# Altium PCB dual_channel.PcbDoc
Units mm, origin at the board's own origin, x right, y up, seen from the top; angles counter-clockwise.
Board outline 74.68 x 95.9 mm, 2 copper layers (Top Layer, Bottom Layer); 79 components, 38 nets, 223 pads, 57 vias.
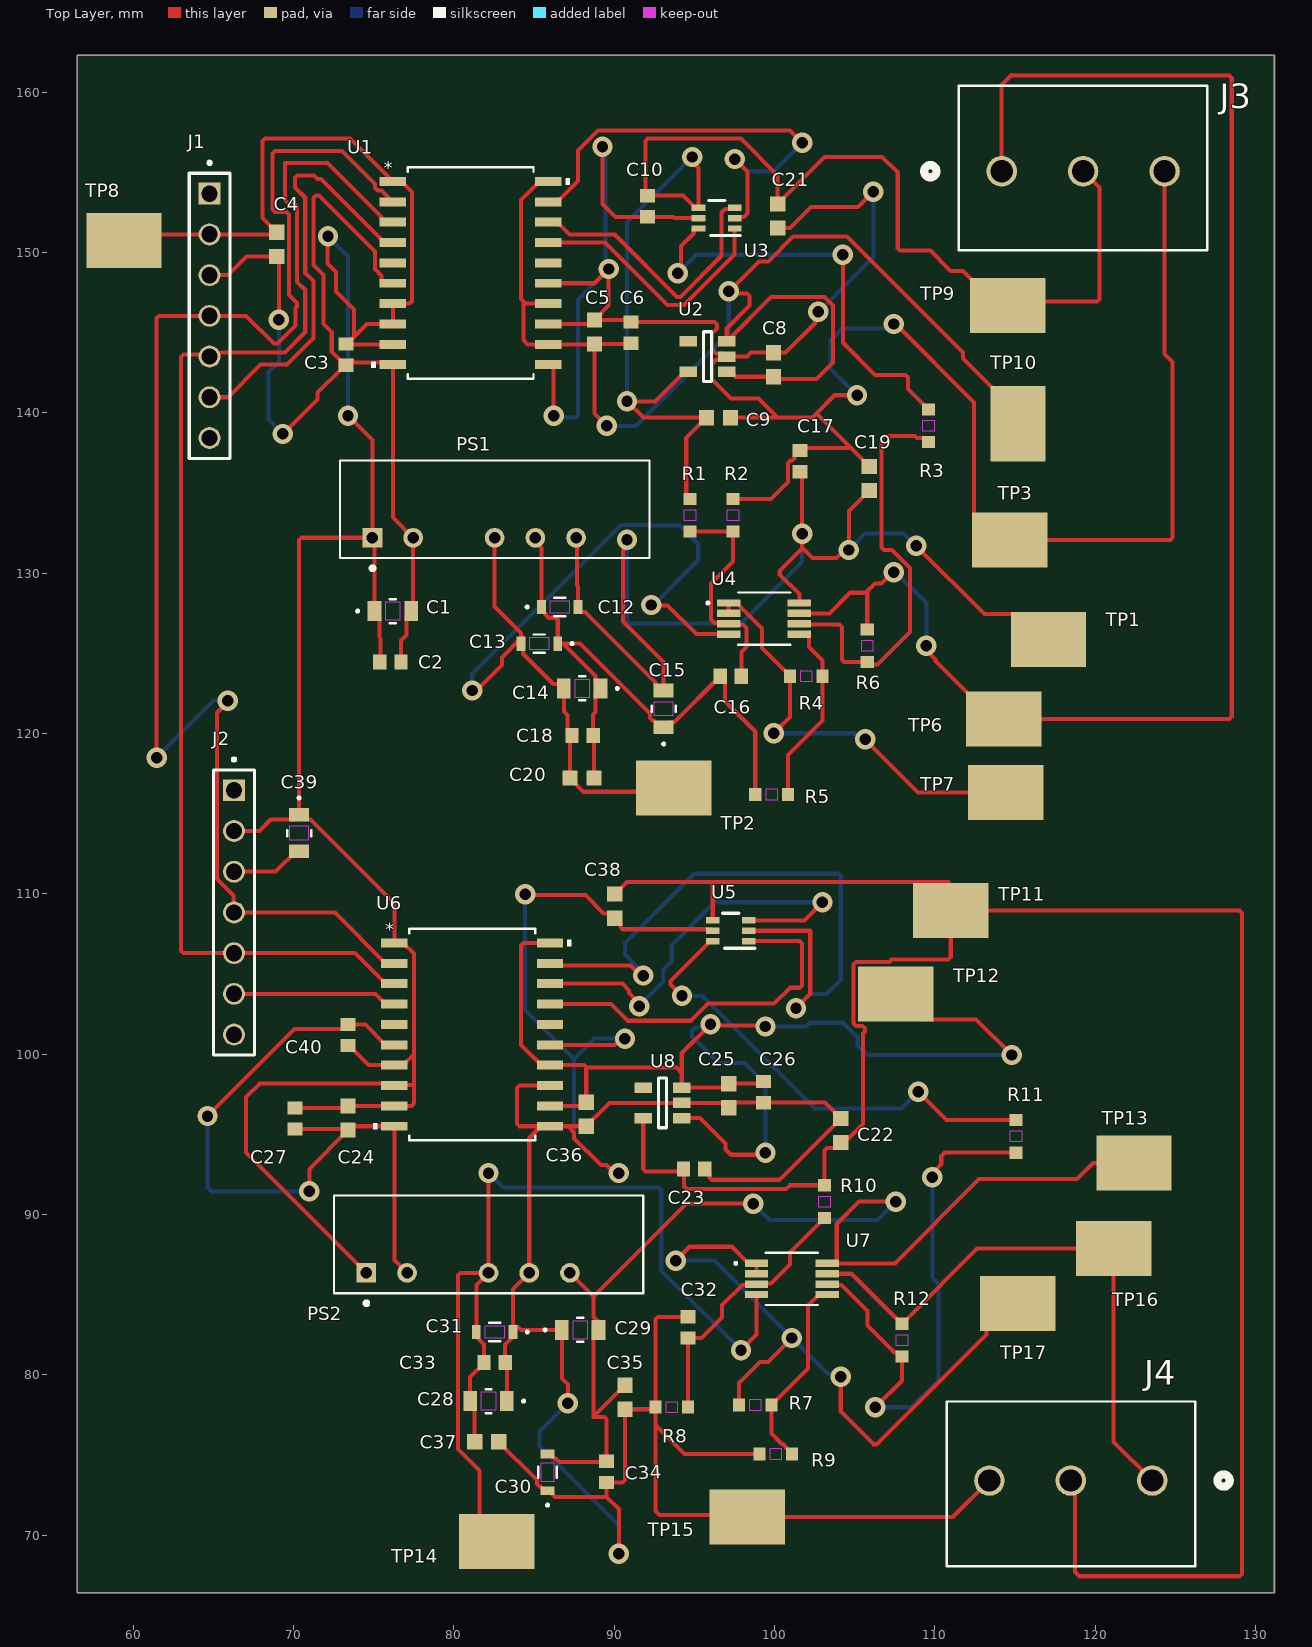
[diagram p0: Top Layer view]
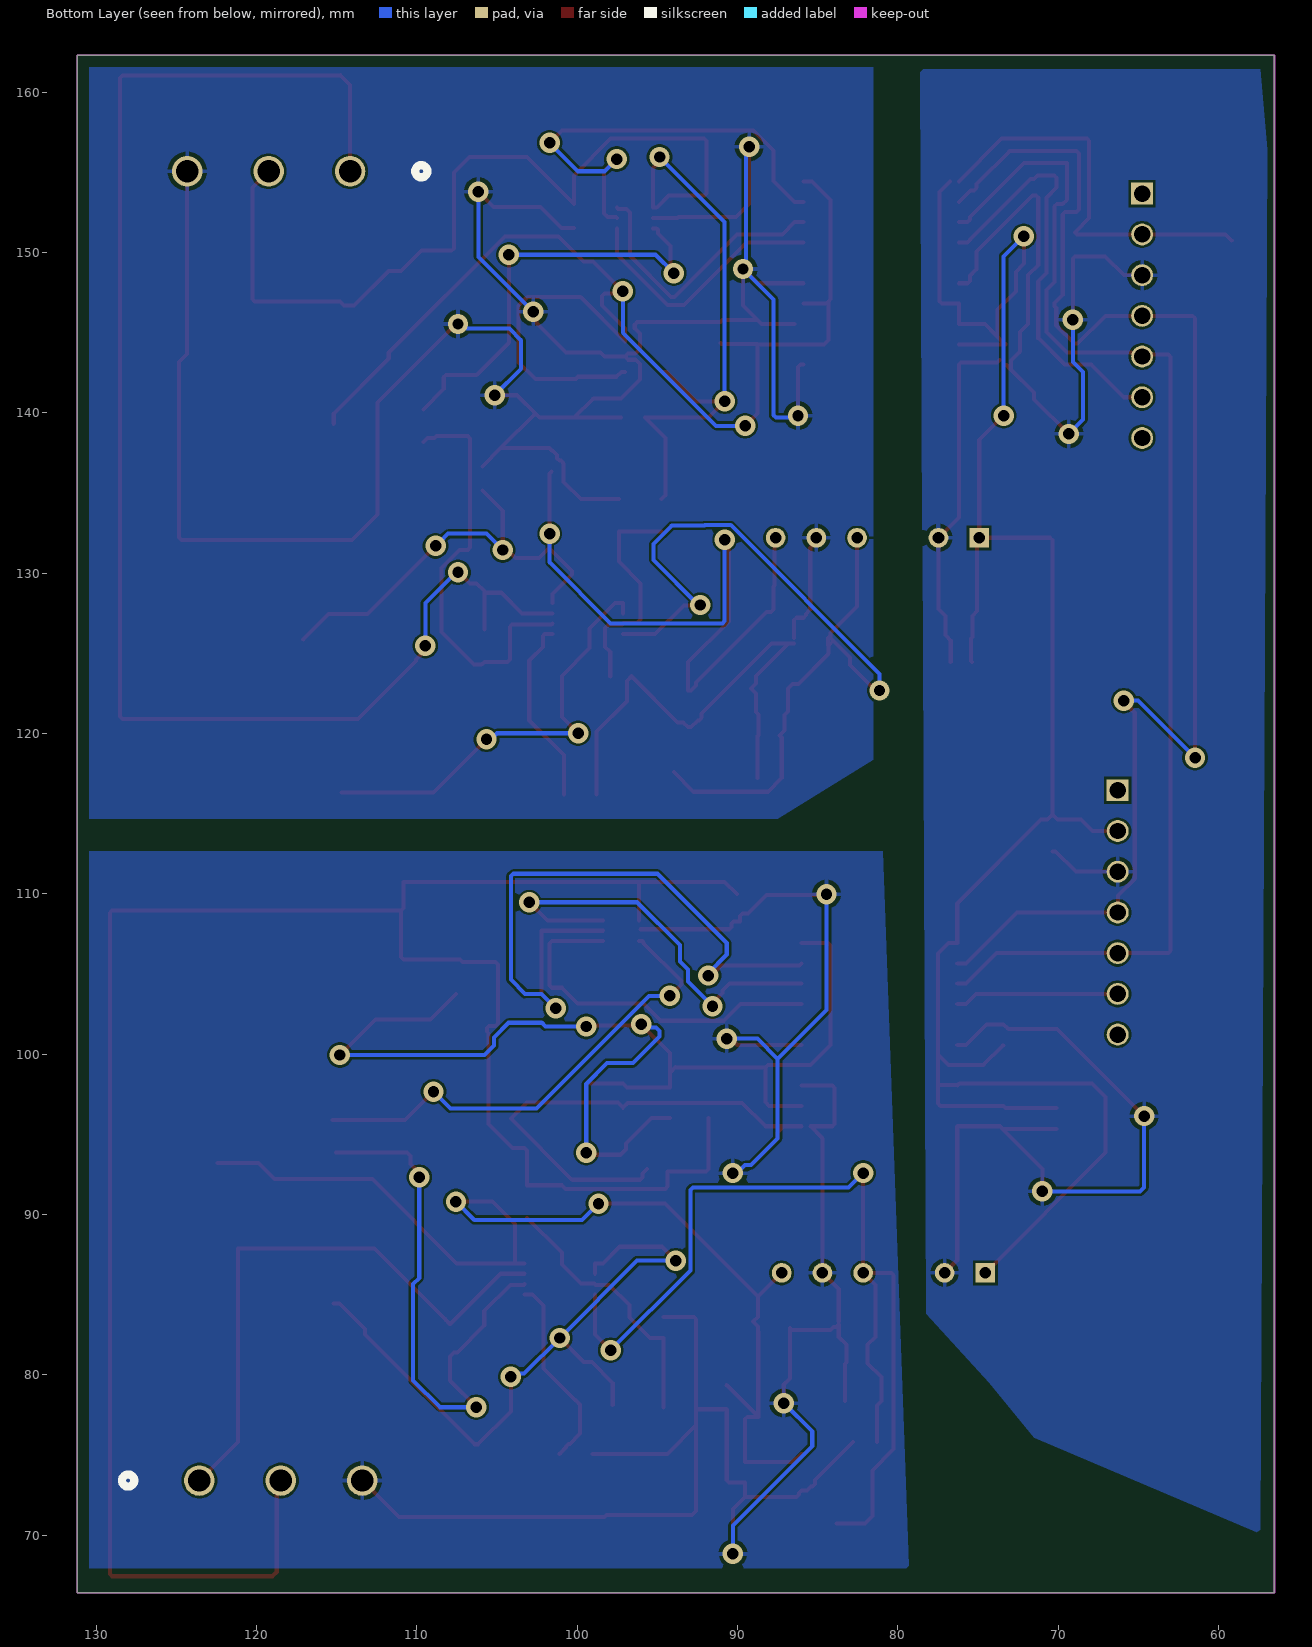
[diagram p1: Bottom Layer view, seen from below]

## Layer stack, top to bottom
Top Solder: solder mask 0.0102, Solder Resist, Dk 3.5
Top Layer: signal copper 0.0356
Dielectric 1: dielectric 0.32, FR-4, Dk 4.8
Bottom Layer: signal copper 0.0356
Bottom Solder: solder mask 0.0102, Solder Resist, Dk 3.5

## Board outline
56.515,66.404 56.515,162.306 131.191,162.306 131.191,66.404

## Design rules (kind name [scope] priority, off if disabled: settings)
Clearance [All] p1: gap=0.15 ignorepadtopadclearanceinfootprint=FALSE
MinimumSolderMaskSliver [All] p1: minsoldermaskwidth=0.1
PolygonConnect [All] p1: connectstyle=Relief reliefconductorwidth=0.254 reliefentries=4 polygonreliefangle="90 Angle" airgapwidth=0.254
RoutingVias [All] p1: holewidth=0.711 width=1.27 viastyle="Through Hole" minholewidth=0.711 minwidth=1.27 maxholewidth=0.711 maxwidth=1.27
SilkToSilkClearance [All] p1: silktosilkclearance=0.1
SolderMaskExpansion [All] p1: expansion=0.102 istentingtop=FALSE
Width [All] p1: maxlimit=0.254 minlimit=0.254 preferedwidth=0.254
28 further rules are at their usual default settings.

## Components (designator, comment, footprint, x,y, rotation, side; value= is the part's Value field where it differs from the comment)
C1 "10uF" G-21_MUR 76.2,127.635 r0 top
C2 "100nF" CAPC1608X90N 76.048,124.46 r0 top
C3 "100nF SYS" CAPC1608X90N 73.279,143.637 r90 top
C4 "1uF" INDC1608X90N 68.961,150.507 r90 top
C5 "1uF" INDC1608X90N 88.773,145.046 r90 top
C6 "100nF ISO" CAPC1608X90N 91.059,145.009 r270 top
C8 "1uF" INDC1608X90N 99.949,143.002 r270 top
C9 "1uF" INDC1608X90N 96.52,139.7 r180 top
C10 "100nF" CAPC1608X90N 92.075,152.883 r90 top
C12 "470nF" CAP_1608_TDK 86.614,127.889 r0 top
C13 "470nF" CAP_1608_TDK 85.344,125.603 r180 top
C14 "10uF" G-21_MUR 88.011,122.809 r180 top
C15 "10uF" G-21_MUR 93.091,121.539 r90 top
C16 "100nF" CAPC1608X90N 97.282,123.571 r180 top
C17 "100nF" CAPC1608X90N 101.6,136.986 r90 top
C18 "100nF" CAPC1608X90N 88.036,119.888 r180 top
C19 "1uF" INDC1608X90N 105.918,135.902 r90 top
C20 "1uF" INDC1608X90N 87.999,117.221 r180 top
C21 "1uF" INDC1608X90N 100.203,152.273 r90 top
C22 "1uF" INDC1608X90N 104.14,95.238 r270 top
C23 "100nF" CAPC1608X90N 94.996,92.837 r180 top
C24 "1uF" INDC1608X90N 73.406,96.012 r90 top
C25 "1uF" INDC1608X90N 97.155,97.409 r270 top
C26 "100nF ISO_2" CAPC1608X90N 99.314,97.638 r90 top
C27 "100nF SYS" CAPC1608X90N 70.104,95.987 r90 top
C28 "10uF" G-21_MUR 82.169,78.359 r180 top
C29 "10uF" G-21_MUR 87.884,82.804 r0 top
C30 "470nF" CAP_1608_TDK 85.852,73.914 r90 top
C31 "470nF" CAP_1608_TDK 82.55,82.677 r180 top
C32 "100nF" CAPC1608X90N 94.615,82.956 r90 top
C33 "100nF" CAPC1608X90N 82.55,80.772 r180 top
C34 "100nF" CAPC1608X90N 89.535,73.939 r270 top
C35 "1uF" INDC1608X90N 90.678,78.601 r270 top
C36 "1uF" INDC1608X90N 88.265,96.254 r90 top
C37 "1uF" INDC1608X90N 82.054,75.819 r180 top
C38 "1uF" INDC1608X90N 90.043,109.232 r90 top
C39 "10uF" G-21_MUR 70.358,113.792 r270 top
C40 "100nF" CAPC1608X90N 73.406,101.194 r90 top
J1 "SS-107-T-1A" SAMTEC_SS-107-T-1A 64.77,153.67 r90 top
J2 "SS-107-T-1A" SAMTEC_SS-107-T-1A 66.294,116.459 r90 top
J3 "1716030000" "CONN_LM 5.080390_WED" 114.173,155.067 r0 top
J4 "1716030000" "CONN_LM 5.080390_WED" 123.571,73.406 r180 top
PS1 "IA0305S" XP_IA0305S 74.93,132.207 r0 top
PS2 "IA0305S" XP_IA0305S 74.549,86.36 r0 top
R1 "10K" RC0603N_YAG 94.742,133.604 r270 top
R2 "10K" RC0603N_YAG 97.409,133.604 r90 top
R3 "10K" RC0603N_YAG 109.601,139.192 r270 top
R4 "10K" RC0603N_YAG 101.981,123.571 r0 top
R5 "20K" RC0603N_YAG 99.822,116.205 r180 top
R6 "20K" RC0603N_YAG 105.791,125.476 r270 top
R7 "10K" RC0603N_YAG 98.806,78.105 r0 top
R8 "10K" RC0603N_YAG 93.599,77.978 r180 top
R9 "20K" RC0603N_YAG 100.076,75.057 r180 top
R10 "10K" RC0603N_YAG 103.124,90.805 r270 top
R11 "10K" RC0603N_YAG 115.062,94.869 r270 top
R12 "20K" RC0603N_YAG 107.95,82.169 r270 top
TP1 "+ISO_P5V" KEYSTONE_5016 117.094,125.857 r0 top
TP2 "-ISO_N5V" KEYSTONE_5016 93.726,116.586 r0 top
TP3 "ISO_GND_ISOW" KEYSTONE_5016 114.681,132.08 r0 top
TP6 "Bi_PolarOut" KEYSTONE_5016 114.3,120.904 r0 top
TP7 "VREF_MID_TP" KEYSTONE_5016 114.427,116.332 r0 top
TP8 "TP_SYS_3V3" KEYSTONE_5016 59.436,150.749 r0 top
TP9 "TP_ISO_3V3_CLEAN" KEYSTONE_5016 114.554,146.685 r0 top
TP10 "TP_ISO_3V3_RAW" KEYSTONE_5016 115.189,139.319 r90 top
TP11 "TP_ISO_3V3_CLEAN_2" KEYSTONE_5016 110.998,108.966 r0 top
TP12 "TP_ISO_3V3_RAW_2" KEYSTONE_5016 107.569,103.759 r0 top
TP13 "+ISO_P5V_2" KEYSTONE_5016 122.428,93.218 r0 top
TP14 "-ISO_N5V_2" KEYSTONE_5016 82.677,69.596 r0 top
TP15 "ISO_GND_ISOW_2" KEYSTONE_5016 98.298,71.12 r0 top
TP16 "Bi_PolarOut_2" KEYSTONE_5016 121.158,87.884 r0 top
TP17 "VREF_MID_TP_2" KEYSTONE_5016 115.189,84.455 r0 top
U1 "ISOW7741DFM" SOIC20_DFM_TEX 81.051,148.717 r0 top
U2 "TLV70233DBVT" DBV0005A_N 95.828,143.51 r180 top
U3 "DAC8411IDCKT" DCK0006A_N 96.393,152.146 r180 top
U4 "OPA2192IDGKR" DGK0008A_N_TEX 99.355,127.168 r0 top
U5 "DAC8411IDCKT" DCK0006A_N 97.282,107.696 r180 top
U6 "ISOW7741DFM" SOIC20_DFM_TEX 81.153,101.219 r0 top
U7 "OPA2192IDGKR" DGK0008A_N_TEX 101.092,85.979 r0 top
U8 "TLV70233DBVT" DBV0005A_N 93.021,96.962 r180 top

## Footprints (in the part's own frame and the unit in brackets; to place one, negate y for a bottom-side part, rotate by r counter-clockwise, add the part's x,y. Pads: shape width x height; smd on the part's side, far side on the other; paste and mask are expansions set on the pad)
CAP_1608_TDK [mil]
  rect 21.78x35 smd paste+0 mask+0: 1(-45,0) 2(45,0)
  Top Layer keep-out region: -23.5,-15.5 -23.5,15.5 23.5,15.5 23.5,-15.5
  silkscreen extent -83,-22 13,22, body extent -34,-17 34,17, height 35
CAPC1608X90N [mm]
  rect 0.83x0.94 smd: 1(-0.66,0) 2(0.66,0)
"CONN_LM 5.080390_WED" [mil]
  round 75 hole 55 paste-99999 mask+0: 1(0,0) 2(200,0) 3(400,0)
  silkscreen extent -190,-194 505,210
DBV0005A_N [mm]
  rect 1.1x0.65 smd paste-0.102 mask+0.051: 1(-1.2,0.95) 2(-1.2,0) 3(-1.2,-0.95) 4(1.2,-0.95) 5(1.2,0.95)
  silkscreen extent -0.25,-1.55 0.25,1.55
DCK0006A_N [mm]
  rect 0.85x0.4 smd paste+0 mask+0.051: 1(-1.125,0.65) 2(-1.125,0) 3(-1.125,-0.65) 4(1.125,-0.65) 5(1.125,0) 6(1.125,0.65)
  silkscreen extent -1.5,-1.09 0.51,1.09
DGK0008A_N_TEX [mm]
  rect 1.448x0.457 smd paste+0 mask+0.051: 1(-2.2,0.975) 2(-2.2,0.325) 3(-2.2,-0.325) 4(-2.2,-0.975) 5(2.2,-0.975) 6(2.2,-0.325) 7(2.2,0.325) 8(2.2,0.975)
  silkscreen extent -3.58,-1.63 1.63,1.63, body extent -2.57,-1.5 2.57,1.5, height 1.09
G-21_MUR [mil]
  rect 33.78x49 smd paste+0 mask+0: 1(-45,0) 2(45,0)
  Top Layer keep-out region: -17.5,-22.5 -17.5,22.5 17.5,22.5 17.5,-22.5
  silkscreen extent -89,-30 7,30, body extent -39,-24 39,24, height 57
INDC1608X90N [mm]
  rect 0.95x0.95 smd: 1(-0.75,0) 2(0.75,0)
KEYSTONE_5016 [mm]
  rect 4.7x3.43 smd: TP(0,0)
  body extent -1.91,-1.42 1.91,1.42, height 2.29
RC0603N_YAG [mil]
  rect 29.78x32 smd paste+0 mask+0: 1(-40,0) 2(40,0)
  Top Layer keep-out region: -13.5,-14 -13.5,14 13.5,14 13.5,-14
  body extent -31,-16 31,16, height 28
SAMTEC_SS-107-T-1A [mil]
  rect 53.78x53.78 hole 40: 01(0,0)
  round 53.78 hole 40: 02(-100,0) 03(-200,0) 04(-300,0) 05(-400,0) 06(-500,0) 07(-600,0)
  silkscreen extent -650,-50 80,50
SOIC20_DFM_TEX [mil]
  rect 65x22 smd paste+0 mask+0: 1(-191,225) 2(-191,175) 3(-191,125) 4(-191,75) 5(-191,25) 6(-191,-25) 7(-191,-75) 8(-191,-125) 9(-191,-175) 10(-191,-225) 11(191,-225) 12(191,-175) 13(191,-125) 14(191,-75) 15(191,-25) 16(191,25) 17(191,75) 18(191,125) 19(191,175) 20(191,225)
  silkscreen extent -244,-260 244,260, body extent -209,-254 209,254, height 140
XP_IA0305S [mm]
  rect 1.228x1.228 hole 0.72: 1(0,0)
  round 1.228 hole 0.72: 2(2.54,0) 4(7.62,0) 5(10.16,0) 6(12.7,0)
  silkscreen extent -2.03,-2.02 17.27,4.82

## Part data
C1 C14 C15 C28 C29 C39: library part GRM21BR61E106KA73L, "Description", Manufacturer_Name=Murata, Copyright="Copyright (C) 2025 Ultra Librarian. All rights reserved.", Manufacturer_Part_Number=GRM21BR61E106KA73L
C2 C3 C6 C10 C16 C17 C18 C23 C26 C27 C32 C33 C34 C40: library part CC0603KRX7R8BB104, "Cap Ceramic 0.1uF 25V X7R 10% Pad SMD 0603 125C T/R", Manufacturer_Name=YAGEO, Mouser Part Number=603-CC603KRX7R8BB104, Datasheet Link=https://www.arrow.com/en/products/cc0603krx7r8bb104/yageo?region=nac, Geometry.Height=0.9mm, Manufacturer_Part_Number=CC0603KRX7R8BB104, Mouser Price/Stock=https://www.mouser.co.uk/ProductDetail/YAGEO/CC0603KRX7R8BB104?qs=AgBp2OyFlx%252B4QOgEm%2Fb3YQ%3D%3D
C4 C5 C8 C9 C19 C20 C21 C22 C24 C25 C35 C36 C37 C38: library part MBASE168SB7105KTNA18, "Taiyo Yuden CAP, MLCC, 0603, 16V, X7R, 1 uF 10 %, T&R", Manufacturer_Name="TAIYO YUDEN", Datasheet Link=https://ds.yuden.co.jp/TYCOMPAS/ut/specSheet?pn=MBASE168SB7105KTNA18, Geometry.Height=0.9mm, Manufacturer_Part_Number=MBASE168SB7105KTNA18
C12 C13 C30 C31: library part C1608X7R1H474K080AC, "CAPACITOR; SMT (0603); CERAMIC CHIP; 0.47UF; 50V; TOL=10%; TG=-55 DEGC TO +125 DEGC; TC=X7R; AUTO", Manufacturer_Name=TDK, Copyright="Copyright (C) 2026 Ultra Librarian. All rights reserved.", Manufacturer_Part_Number=C1608X7R1H474K080AC
J1 J2: Package=None, Availability=Unavailable, MP=SS-107-T-1A, Price=None
J3 J4: "Description", Manufacturer_Name=Weidmuller, Copyright="Copyright (C) 2025 Ultra Librarian. All rights reserved.", Manufacturer_Part_Number=1716030000, RefDes=RefDes, Type=Type
PS1 PS2: "DC DC CONVERTER +/-5V 1W", Package=None, Availability=Unavailable, MP=IA0305S, Price=None
R1 R2 R3 R4 R7 R8 R10 R11: library part RC0603FR-0710KL, "RES SMD 10kO 1% 1/10W 0603", Manufacturer_Name=Yageo, Copyright="Copyright (C) 2025 Ultra Librarian. All rights reserved.", Manufacturer_Part_Number=RC0603FR-0710KL
R5 R6 R9 R12: library part RC0603FR-0720KL, "Description", Manufacturer_Name=Yageo, Copyright="Copyright (C) 2025 Ultra Librarian. All rights reserved.", Manufacturer_Part_Number=RC0603FR-0720KL
TP1 TP2 TP3 TP6 TP7 TP8 TP9 TP10 TP11 TP12 TP13 TP14 TP15 TP16 TP17: library part 5016, "Test Point Compact SMT Phos Bronze/Silver 1000pc Tape & Reel", Package="NON STANDARD-1 Keystone", Check_prices=https://www.snapeda.com/parts/5016/Keystone/view-part/?ref=eda, MF="Keystone Electronics", MP=5016, SnapEDA_Link=https://www.snapeda.com/parts/5016/Keystone/view-part/?ref=snap
U1 U6: "Low-emissions, low-ripple, quad-channel, 3/1, reinforced digital isolator with integrated power 20-SOIC -40 to 125", Manufacturer_Name="Texas Instruments", Copyright="Copyright (C) 2026 Ultra Librarian. All rights reserved.", Manufacturer_Part_Number=ISOW7741DFM, RefDes=RefDes, Type=Type
U2 U8: "300-mA, high-PSRR, low-IQ, low-dropout voltage regulator with enable 5-SOT-23 -40 to 125", Alternate_PartNumber=TLV70212DBVT, Manufacturer="Texas Instruments", PartNumber=TLV70212DBVR, CompType=IC, Copyright="Copyright (C) 2026 Ultra Librarian. All rights reserved.", Manufacturer_Name="Texas Instruments", Manufacturer_Part_Number=TLV70233DBVT, MountType=SMT, PackageReference=DBV0005A, RefDes=RefDes, RoHS=Y, Type=TYPE
U3 U5: "16bit, Single Channel, 80uA, 2.0V-5.5V DAC in SC70 Package 6-SC70 -40 to 125", Manufacturer="Texas Instruments", PartNumber=DAC8411IDCKR, Alternate_PartNumber=DAC8411IDCKT, CompType=IC, Copyright="Copyright (C) 2025 Ultra Librarian. All rights reserved.", Manufacturer_Name="Texas Instruments", Manufacturer_Part_Number=DAC8411IDCKT, MountType=SMT, PackageReference=DCK0006A, RefDes=RefDes, RoHS=Y, Type=TYPE
U4 U7: "36-V, Precision, RRIO, Low Offset Voltage, Low Input Bias Current Op Amp With e-trim 8-VSSOP -40 to 125", Manufacturer_Name="Texas Instruments", Copyright="Copyright (C) 2025 Ultra Librarian. All rights reserved.", Manufacturer_Part_Number=OPA2192IDGKR, RefDes=RefDes, Type=Type

## Via types
v1: diameter 1.27, hole 0.711, Top Layer to Bottom Layer, 57 vias

## Nets (pads, with @x,y where several pads share a name; then routed paths per layer and width w, separated by ;. In a path a pad name is that pad's centre, name@x,y a point inside that pad or via, vN(x,y) a via of type N, cw(c..) or ccw(c..) an arc to the next point about the centre after c; other vN are vias at no path point)
BIPOLAR_OUT: J3.1 R6.1 TP6.TP U4.7 | length 95.6
  Top Layer w0.254: U4.7 103.442,127.493 104.727,128.778 105.707,128.778 ; R6.1 105.791,128.883 106.276,129.368 106.685,129.368 107.364,130.048 v1(107.442,130.048) ; v1(109.474,125.476) 109.474,125.201 110.049,124.626 110.049,124.52 113.665,120.904 TP6.TP 128.375,120.904 128.524,121.053 128.524,160.887 128.375,161.036 114.808,161.036 114.786,161.058 114.173,160.445 J3.1
  Bottom Layer w0.254: v1@107.442,130.175 109.474,128.143 v1@109.474,125.73
BIPOLAR_OUT_2: J4.1 R12.1 TP16.TP U7.7 | length 36.6
  Top Layer w0.254: U7.7 104.803,86.304 107.922,83.185 R12.1 107.978,83.185 108.229,83.436 108.229,83.464 112.649,87.884 TP16.TP 121.158,75.819 J4.1
CS_ISO: U1.17 U3.1 | length 16.1
  Top Layer w0.254: U1.17 89.448,150.622 93.343,146.727 94.359,146.727 97.518,149.886 U3.1
CS_ISO_2: U5.1 U6.17 | length 23.1
  Top Layer w0.254: U6.17 89.809,103.124 90.848,102.085 94.798,102.085 95.867,103.154 99.979,103.154 100.965,104.14 101.578,104.14 101.727,104.289 101.727,106.912 101.578,107.061 98.422,107.061 U5.1
DAC_OUT_UNIPOLAR: R3.1 U3.6 | length 27.2
  Top Layer w0.254: v1(93.98,148.717) 94.174,148.911 94.174,150.402 94.97,151.198 94.97,151.423 95.043,151.496 U3.6 ; v1(104.267,149.86) 104.267,144.371 106.271,142.367 108.182,142.367 108.331,142.218 108.331,141.478 R3.1
  Bottom Layer w0.254: v1(93.98,148.717) 95.123,149.86 v1(104.267,149.86)
DAC_OUT_UNIPOLAR_2: R11.1 U5.6 | length 30.1
  Top Layer w0.254: v1(94.234,103.632) 93.512,104.354 93.512,104.564 95.859,106.911 95.859,106.973 95.932,107.046 U5.6 ; v1(108.966,97.663) 110.744,95.885 R11.1@115.27,95.885
  Bottom Layer w0.254: v1(94.234,103.632) 95.524,103.632 102.54,96.615 107.918,96.615 v1(108.966,97.663)
FAULT_TO_PICO: J1.07
FAULT_TO_PICO_2: J2.07
IN+_B: R4.2 R5.1 U4.5 | length 11.8
  Top Layer w0.254: R5.1 100.838,118.646 102.997,120.805 R4.2 102.997,124.548 102.152,125.393 102.152,126.091 102.05,126.193 U4.5
IN+_B_2: R7.2 R9.1 U7.5 | length 12.3
  Top Layer w0.254: R9.1 101.092,75.085 100.696,75.481 100.696,75.527 100.534,75.69 100.459,75.69 99.822,76.327 99.822,78.133 100.073,78.384 100.101,78.384 102.108,80.391 102.108,84.315 102.797,85.004 U7.5
IN-_B: R3.2 R6.2 U4.6 | length 26.3
  Top Layer w0.254: U4.6 101.595,126.803 104.06,126.803 104.209,126.654 104.209,124.609 104.357,124.46 R6.2 105.959,124.292 106.43,124.292 108.458,126.321 108.458,130.322 107.335,131.445 106.829,131.445 106.68,131.594 106.68,138.408 106.829,138.557 108.774,138.557 108.904,138.427 109.35,138.427 R3.2
IN-_B_2: R11.2 R12.2 U7.6 | length 34.7
  Top Layer w0.254: U7.6 103.332,85.614 104.174,85.614 105.805,83.982 105.805,83.077 107.477,81.404 107.699,81.404 R12.2 107.95,79.629 v1(106.299,77.978) ; v1(109.855,92.329) 109.855,92.604 110.409,93.158 110.409,93.645 110.617,93.853 R11.2
  Bottom Layer w0.254: v1(106.299,77.978) 108.563,77.978 110.236,79.651 110.236,85.662 109.855,86.043 v1(109.855,92.329)
ISO_3V3_CLEAN: C9.2 C10.2 C21.2 J3.2 R1.1 TP9.TP U2.5 U3.4 | length 90.4
  Top Layer w0.254: U2.5 94.403,142.56 92.559,140.716 v1(90.805,140.716) 91.821,139.7 C9.2 94.5,138.43 94.5,134.862 R1.1 ; v1(94.869,155.956) 94.869,155.681 95.268,155.282 U3.4 95.043,152.796 94.296,153.543 C10.2 91.948,153.67 91.948,156.95 92.097,157.099 97.917,157.099 100.203,154.813 C21.2 103.136,155.956 106.72,155.956 107.696,154.98 107.696,150.263 107.845,150.114 109.728,150.114 110.998,148.844 111.76,148.844 113.919,146.685 TP9.TP 114.808,146.939 120.12,146.939 120.269,147.088 120.269,154.051 J3.2
  Bottom Layer w0.254: v1(90.805,140.716) 90.805,151.892 v1(94.869,155.956)
ISO_3V3_CLEAN_2: C22.2 C23.2 C38.2 J4.2 R10.1 TP11.TP U5.4 U8.5 | length 141.8
  Top Layer w0.254: C38.2 90.805,110.744 96.157,110.744 ; U8.5 91.821,92.831 91.97,92.682 94.361,92.682 94.361,91.739 94.51,91.59 100.734,91.59 100.965,91.821 R10.1 103.124,93.98 103.284,94.14 104.034,94.14 105.525,95.631 105.525,101.289 105.644,101.408 105.644,101.618 105.495,101.767 105.104,101.767 104.942,101.929 104.942,105.589 105.104,105.751 107.166,105.751 107.315,105.9 110.849,105.9 110.998,106.049 TP11.TP ; U5.4 96.157,110.744 ; J4.2 118.745,73.152 118.745,67.691 118.999,67.437 129.01,67.437 129.159,67.586 129.159,108.817 129.01,108.966 TP11.TP ; 96.157,110.744 110.849,110.744 110.849,109.115 TP11.TP
ISO_3V3_RAW: C5.1 C6.2 C8.2 TP10.TP U1.12 U1.14 U1.20 U2.1 U2.3 | length 86
  Top Layer w0.254: U1.14 84.477,146.812 84.339,146.95 ; U1.20 85.357,154.432 84.201,153.276 84.201,147.088 84.339,146.95 ; v1(89.535,139.192) 88.773,139.954 C5.1 ; C6.2 91.006,144.296 C5.1 ; U2.1 97.253,142.56 97.561,142.252 C8.2 100.088,142.113 102.616,142.113 103.655,143.152 103.655,146.682 103.121,147.216 99.784,147.216 U2.3 97.028,145.269 98.447,146.687 98.447,147.298 98.298,147.447 97.282,147.447 v1(97.155,147.574) 99.03,149.449 99.618,149.449 101.172,151.003 104.521,151.003 111.76,143.764 111.76,143.383 115.189,139.954 TP10.TP ; 84.339,146.95 84.339,144.548 84.615,144.272 U1.12 88.749,144.272 C5.1
  Bottom Layer w0.254: v1(89.535,139.192) 91.353,139.192 97.155,144.994 v1(97.155,147.574)
ISO_3V3_RAW_2: C25.1 C26.2 C36.2 TP12.TP U6.12 U6.14 U6.20 U8.1 U8.3 | length 80.4
  Top Layer w0.254: U6.12 88.035,96.774 C36.2 88.265,99.165 ; U6.20 84.35,106.934 84.201,106.785 84.201,100.571 85.458,99.314 U6.14 88.116,99.314 88.265,99.165 ; U8.1 95.368,96.012 96.961,94.42 96.961,94.068 97.303,93.726 99.314,93.726 v1(99.441,93.853) ; C26.2 99.175,98.159 C25.1 96.908,97.912 U8.3 94.221,98.837 ; v1(99.441,101.727) 99.377,101.79 96.075,101.79 v1(96.012,101.854) 94.221,100.063 94.221,98.837 ; TP12.TP 109.157,102.171 112.586,102.171 v1(114.808,99.949) ; 88.265,99.165 93.831,99.165 93.862,99.196 94.221,98.837
  Bottom Layer w0.254: v1(96.012,101.854) 95.818,101.66 95.077,101.66 94.869,101.451 94.869,101.092 96.52,99.441 98.149,99.441 99.441,98.149 v1(99.441,93.853) ; v1(99.441,101.727) 101.985,101.727 102.216,101.958 104.29,101.958 105.197,101.051 105.197,100.543 105.791,99.949 v1(114.808,99.949)
ISO_GND_ISOW: C5.2 C6.1 C8.1 C9.1 C10.1 C12.1 C13.1 C14.1 C15.1 C16.2 C17.2 C18.1 C19.2 C20.1 C21.1 J3.3 PS1.5 R2.2 R5.2 TP3.TP U1.11 U1.13 U1.15 U2.2 U3.5 | length 203.5
  Top Layer w0.254: PS1.5 85.09,131.943 85.471,131.562 85.471,127.721 85.74,127.452 85.74,127.381 85.902,127.218 86.338,127.218 86.487,127.07 C13.1@86.487,125.943 ; U1.11 86.081,143.002 86.233,142.85 v1(86.233,139.827) ; U1.15 88.773,148.082 v1(89.662,148.971) 89.662,146.685 C5.2 ; U1.13@86.449,145.542 88.519,145.542 C5.2 ; C13.1 86.827,125.603 ; C20.1 88.749,119.835 C18.1 88.696,121.194 88.852,121.35 88.852,122.507 C14.1 88.852,123.111 88.852,123.578 86.827,125.603 ; v1(89.281,156.591) 89.281,153.035 90.093,152.223 C10.1 93.69,152.223 93.767,152.146 U3.5 ; C9.1 100.191,139.7 ; R2.2 99.777,134.62 100.853,135.696 100.853,136.856 101.015,137.018 101.108,137.018 101.257,137.167 101.257,137.358 101.545,137.646 C17.2 101.749,137.795 104.775,137.795 ; R5.2 98.806,120.115 96.91,122.011 96.91,123.283 C16.2 93.749,120.698 93.393,120.698 C15.1 92.898,120.396 92.476,120.818 92.405,120.818 92.243,120.98 92.243,121.244 87.884,125.603 86.827,125.603 ; C21.1 100.973,151.523 102.291,152.841 105.216,152.841 v1(106.172,153.797) ; v1(102.743,146.304) 102.549,146.11 102.549,145.602 100.699,143.752 C8.1 98.548,143.752 98.306,143.51 U2.2 ; v1(105.156,141.097) 103.759,141.097 102.616,139.954 ; C19.2 104.775,137.795 ; v1(107.442,145.542) 107.569,145.542 112.458,140.653 112.458,133.668 114.046,132.08 TP3.TP 124.692,132.08 124.841,132.229 124.841,143.171 124.333,143.679 J3.3 ; C5.2 90.932,145.796 C6.1 96.266,145.669 96.415,145.52 96.415,145.261 96.097,144.943 96.097,143.977 96.366,143.708 96.83,143.708 U2.2 ; U2.2 96.83,143.312 96.366,143.312 96.097,143.043 96.097,142.077 97.286,140.889 99.002,140.889 100.191,139.7 ; 100.191,139.7 102.362,139.7 102.616,139.954 ; 102.616,139.954 104.775,137.795
  Bottom Layer w0.254: v1(86.233,139.827) 86.36,139.7 87.608,139.7 87.757,139.849 87.757,147.066 v1(89.662,148.971) 89.471,149.161 89.471,156.4 v1(89.281,156.591) ; v1(102.743,146.304) 106.172,149.733 v1(106.172,153.797) ; v1(105.156,141.097) 103.505,142.748 103.505,144.526 104.232,145.253 106.878,145.253 107.224,145.599 v1@107.499,145.599
ISO_GND_ISOW_2: C22.1 C23.1 C25.2 C26.1 C28.1 C29.1 C30.1 C31.1 C32.2 C33.1 C34.2 C35.2 C36.1 C37.1 C38.1 J4.3 PS2.5 R8.2 R9.2 TP15.TP U5.5 U6.11 U6.13 U6.15 U8.2 | length 184
  Top Layer w0.254: C37.1 85.181,73.442 85.181,73.202 85.344,73.04 85.415,73.04 85.684,72.771 86.02,72.771 86.169,72.621 86.169,72.539 86.318,72.39 89.535,72.39 ; C28.1 83.312,80.67 C33.1 83.21,81.888 83.693,82.371 C31.1 83.693,83.144 83.843,82.995 84.01,82.995 84.201,82.804 C29.1 ; 83.693,83.312 83.693,85.344 PS2.5 84.709,94.755 85.458,95.504 84.096,95.504 83.947,95.653 83.947,97.895 84.096,98.044 U6.13 ; v1(84.455,109.982) 84.522,109.915 88.205,109.915 89.35,108.77 89.695,108.77 89.841,108.624 89.841,108.279 90.245,108.279 90.391,108.134 90.391,107.938 90.54,107.789 U5.5@96.064,107.789 ; U6.11 87.122,95.504 ; U6.15 90.022,100.584 90.403,100.965 v1(90.678,100.965) ; C29.1@86.741,82.931 C29.1 ; v1(87.122,78.232) 87.122,79.397 86.741,79.778 C29.1 ; C34.2 89.535,72.39 ; C34.2@89.637,73.279 90.529,73.279 90.678,73.428 C35.2 92.456,77.851 R8.2 ; v1(90.297,68.834) 90.297,71.628 89.535,72.39 ; v1(90.297,92.583) 90.022,92.583 89.531,93.074 89.171,93.074 87.513,94.732 87.513,95.113 87.122,95.504 ; C32.2 92.732,83.616 92.583,83.467 R8.2 ; C23.1 95.944,92.549 95.944,92.313 96.093,92.164 100.316,92.164 C22.1 103.15,96.978 C26.1 97.474,96.978 C25.2 96.852,96.962 U8.2 89.723,96.962 C36.1 87.122,95.504 ; R9.2 94.383,75.057 92.583,76.857 ; J4.3 111.125,71.12 TP15.TP 98.171,71.247 92.837,71.247 92.583,71.501 92.583,76.857 ; 92.583,76.857 R8.2
  Bottom Layer w0.254: v1(84.455,109.982) 84.455,102.743 87.503,99.695 ; v1(87.122,78.232) 85.344,76.454 85.344,75.565 90.297,70.612 v1(90.297,68.834) ; v1(90.297,92.583) 90.022,92.583 89.531,93.074 89.171,93.074 87.503,94.742 87.503,99.695 ; v1(90.678,100.965) 88.773,100.965 87.503,99.695
ISO_N5V: C13.2 C14.2 C18.2 C20.2 PS1.4 TP2.TP U4.4 | length 60
  Top Layer w0.254: v1(81.153,122.682) 81.407,122.682 82.998,124.273 82.998,124.741 84.201,125.943 84.201,126.111 ; PS1.4 82.55,127.93 84.201,126.279 84.201,126.111 ; C13.2 84.323,125.481 84.323,124.973 86.207,123.089 86.588,123.089 C14.2 86.868,121.382 87.088,121.162 87.088,120.176 C18.2 87.249,119.761 C20.2 88.105,116.365 92.743,116.365 TP2.TP@93.98,117.602 ; C13.2@84.351,125.52 84.351,125.961 84.285,126.027 84.201,126.111 ; v1(92.329,128.016) 92.352,127.993 93.345,127.993 95.145,126.193 U4.4
  Bottom Layer w0.254: v1(81.153,122.682) 81.153,123.718 90.427,132.992 92.052,132.992 92.075,132.969 94.107,132.969 95.25,131.826 95.25,130.81 92.456,128.016 v1(92.329,128.016)
ISO_N5V_2: C28.2 C31.2 C33.2 C37.2 PS2.4 TP14.TP U7.4 | length 64.8
  Top Layer w0.254: C37.2 81.304,78.081 C28.2 81.026,79.853 81.89,80.717 C33.2 81.89,81.888 81.407,82.371 81.407,83.312 81.407,85.598 PS2.4 ; v1(82.169,92.583) PS2.4 ; TP14.TP@83.82,70.739 82.042,70.739 81.597,71.184 81.597,74.037 80.264,75.37 80.264,86.211 80.413,86.36 PS2.4 ; v1(97.917,81.534) 98.892,82.509 U7.4
  Bottom Layer w0.254: v1(82.169,92.583) 83.081,91.671 92.792,91.671 92.941,91.522 92.941,86.51 v1(97.917,81.534)
ISO_P5V: C12.2 C15.2 C17.1 C19.1 PS1.6 TP1.TP U4.8 | length 74.3
  Top Layer w0.254: PS1.6 87.694,132.143 87.694,129.222 87.759,129.157 87.759,127.724 87.907,127.577 88.196,127.577 92.596,123.177 92.596,122.984 92.898,122.682 C15.2 93.091,124.46 90.551,127 90.551,131.423 90.611,131.483 90.611,131.886 v1(90.805,132.08) ; U4.8 101.555,128.696 100.332,129.919 100.332,130.129 101.727,131.524 ; C17.1 101.727,136.199 v1(101.727,132.461) 101.727,131.593 102.383,130.937 103.865,130.937 104.373,131.445 v1(104.648,131.445) 104.648,133.882 C19.1 ; v1(108.839,131.699) 113.093,127.445 115.506,127.445 TP1.TP
  Bottom Layer w0.254: v1(90.805,132.08) 90.805,127.022 90.954,126.873 97.917,126.873 101.727,130.683 v1(101.727,132.461) ; v1(104.648,131.445) 105.664,132.461 108.055,132.461 108.563,131.953 v1@108.712,131.953
ISO_P5V_2: C29.2 C30.2 C34.1 C35.1 PS2.6 TP13.TP U7.8 | length 70.6
  Top Layer w0.254: C30.2 86.02,75.057 86.289,74.788 86.36,74.788 86.599,74.549 89.535,74.549 C34.1 89.535,77.231 89.386,77.38 88.707,77.38 ; PS2.6 88.725,84.884 ; C35.1 88.714,77.387 88.714,82.668 88.725,82.679 88.725,83.01 89.027,83.312 88.725,83.614 88.725,84.884 ; v1(98.679,90.678) 94.519,90.678 88.725,84.884 ; U7.8 103.787,86.954 103.889,87.056 103.889,89.411 105.283,90.805 v1(107.569,90.805) ; U7.8@103.889,86.954 107.528,86.954 112.776,92.202 118.872,92.202 119.888,93.218 TP13.TP
  Bottom Layer w0.254: v1(98.679,90.678) 99.695,89.662 106.426,89.662 v1(107.569,90.805)
MID_RAW: C16.1 R1.2 R2.1 U4.3 | length 14.3
  Top Layer w0.254: R1.2 R2.1 97.409,130.726 96.05,129.367 96.05,127.107 96.273,126.883 97.115,126.883 U4.3 97.195,126.803 98.037,126.803 98.26,126.579 98.26,125.406 97.942,125.088 C16.1
MID_RAW_2: C32.1 R8.1 R10.2 U7.3 | length 16.8
  Top Layer w0.254: R8.1 C32.1 95.466,82.296 96.738,83.568 96.738,84.341 98.01,85.614 98.852,85.614 U7.3 98.932,85.694 99.774,85.694 100.965,86.886 100.965,87.63 R10.2
MOSI_ISO: U1.18 U3.3 | length 17.4
  Top Layer w0.254: U1.18 86.449,151.892 87.211,151.13 90.043,151.13 93.938,147.235 94.149,147.235 96.712,149.798 96.712,152.504 96.935,152.727 97.449,152.727 U3.3
MOSI_ISO_2: U5.3 U6.18 | length 26.6
  Top Layer w0.254: U6.18 90.511,104.394 90.942,103.963 90.942,103.809 91.567,103.184 v1(91.567,102.997) ; U5.3 101.869,108.346 v1(102.997,109.474)
  Bottom Layer w0.254: v1(91.567,102.997) 93.091,104.521 93.091,105.283 93.599,105.791 93.599,106.807 96.266,109.474 v1(102.997,109.474)
SCLK_ISO: U1.19 U3.2 | length 29
  Top Layer w0.254: U1.19 86.449,153.162 87.752,154.465 87.752,156.352 89.007,157.607 100.965,157.607 v1(101.727,156.845) ; U3.2 97.587,152.215 98.101,152.215 98.324,152.438 98.324,155.041 v1(97.536,155.829)
  Bottom Layer w0.254: v1(97.536,155.829) 98.298,155.067 99.949,155.067 v1(101.727,156.845)
SCLK_ISO_2: U5.2 U6.19 | length 43
  Top Layer w0.254: U6.19 86.131,105.537 91.019,105.537 91.654,104.902 v1(91.821,104.902) ; U5.2 102.235,107.696 102.235,103.759 v1(101.346,102.87)
  Bottom Layer w0.254: v1(91.821,104.902) 91.821,105.069 90.678,106.212 90.678,106.934 94.996,111.252 103.991,111.252 104.14,111.103 104.14,104.648 103.251,103.759 102.235,103.759 v1(101.346,102.87)
SPI_CS_SYS: J1.06 U1.4 | length 26.4
  Top Layer w0.254: J1.06 65.913,140.97 67.945,143.002 69.596,143.002 71.247,144.653 71.247,148.209 70.739,148.717 70.739,153.416 70.104,154.051 70.104,154.664 70.253,154.813 71.291,154.813 71.512,154.592 71.722,154.592 75.501,150.813 75.501,150.774 75.654,150.622 U1.4
SPI_CS_SYS_2: J2.06 U6.4 | length 10.3
  Top Layer w0.254: J2.06 75.12,103.759 75.755,103.124 U6.4
SPI_MOSI_SYS: J1.05 J2.05 U1.3 U6.3 | length 79.3
  Top Layer w0.254: J1.05 64.983,143.723 65.434,143.723 65.475,143.764 69.469,143.764 70.739,145.034 70.739,147.657 70.231,148.165 70.231,152.886 70.082,153.035 69.723,153.035 69.469,153.289 69.469,155.575 72.136,155.575 75.501,152.21 75.501,152.044 75.654,151.892 U1.3 ; J1.05@64.77,143.637 63.141,143.637 62.992,143.488 62.992,106.448 63.141,106.299 J2.05 73.85,106.299 75.755,104.394 U6.3
SPI_SCLK_SYS: J1.04 J2.04 U1.2 U6.2 | length 89.3
  Top Layer w0.254: v1(61.468,118.491) 61.468,145.901 61.617,146.05 J1.04 65.913,146.05 67.056,146.05 68.792,144.314 69.003,144.314 70.126,145.437 70.126,146.536 70.224,146.635 70.224,146.845 69.723,147.346 69.723,152.378 69.574,152.527 68.856,152.527 68.707,152.676 68.707,156.188 68.856,156.337 73.025,156.337 75.098,154.264 75.098,154.038 75.26,153.876 75.486,153.876 U1.2 ; v1(65.913,122.047) 65.913,121.976 65.23,121.293 65.23,110.938 66.265,109.903 66.265,108.868 J2.04 72.581,108.839 75.755,105.664 U6.2
  Bottom Layer w0.254: v1(61.468,118.491) 65.024,122.047 v1(65.913,122.047)
SYS_3V3: C1.1 C2.1 C3.2 C4.2 C24.2 C27.2 C39.1 C40.1 J1.02 J2.02 PS1.1 PS2.1 TP8.TP U1.1 U1.7 U1.8 U1.9 U6.1 U6.7 U6.8 U6.9 | length 161.9
  Top Layer w0.254: TP8.TP@59.182,150.749 59.563,151.13 J1.02 65.913,151.13 68.834,151.13 C4.2 68.072,152.146 68.072,156.95 68.221,157.099 73.533,157.099 U1.1 ; J2.02 67.872,113.919 68.586,114.633 70.056,114.633 C39.1 ; C27.2 73.291,96.647 C24.2 73.418,96.774 U6.9 77.359,96.774 77.508,96.923 77.508,98.066 ; v1(72.159,151.003) 72.136,150.98 72.136,149.301 72.644,148.793 72.644,147.574 73.787,146.431 73.787,144.805 ; C3.2 73.304,144.272 U1.9 ; C3.2@73.334,144.297 73.622,144.585 73.815,144.778 74.579,145.542 U1.8 U1.7 77.258,146.812 77.406,146.961 77.406,153.772 U1.1@76.746,154.432 ; C40.1 73.461,100.534 74.681,99.314 U6.7 76.848,99.314 77.508,99.974 ; v1(73.406,139.827) 74.93,138.303 PS1.1 ; PS2.1 67.056,93.853 67.056,97.326 67.901,98.171 76.175,98.171 U6.8 76.323,98.066 77.508,98.066 ; C2.1 75.438,124.51 75.438,125.932 75.359,126.011 75.359,127.333 C1.1 75.057,132.08 PS1.1 ; C39.1 70.358,132.058 70.507,132.207 PS1.1 ; C39.1 70.66,114.633 71.072,114.633 76.302,109.403 U6.1 76.848,106.934 77.508,106.274 77.508,99.974 ; 77.508,98.066 77.508,99.974
  Bottom Layer w0.254: v1(72.159,151.003) 73.406,149.756 v1(73.406,139.827)
SYS_GND: C1.2 C2.2 C3.1 C4.1 C24.1 C27.1 C39.2 C40.2 J1.03 J2.03 PS1.2 PS2.2 U1.6 U1.10 U6.6 U6.10 | length 114.6
  Top Layer w0.254: v1(64.643,96.139) 70.07,101.566 73.118,101.566 C40.2 74.486,101.854 75.755,100.584 U6.6 ; J1.03 65.913,148.59 67.08,149.757 C4.1 69.088,149.63 v1(69.088,145.796) ; J2.03 68.895,111.379 70.165,112.649 C39.2 ; v1(69.342,138.684) 71.501,140.843 71.501,141.254 C3.1@72.995,142.748 ; C27.1 73.341,95.327 73.341,95.197 70.993,92.849 v1(70.993,91.44) ; C3.1 73.224,142.977 C3.1@72.995,142.748 ; C24.1 73.648,95.504 U6.10 76.302,87.147 PS2.2 ; C3.1@73.666,143.309 73.834,143.141 76.061,143.141 U1.10 76.2,133.477 PS1.2 77.47,127.762 C1.2 77.041,127.333 77.041,126.138 76.708,125.805 C2.2 ; U1.6 75.658,148.082 75.505,148.234 75.505,148.55 75.098,148.958 75.098,150.073 71.606,153.565 71.396,153.565 71.247,153.416 71.247,149.225 71.882,148.59 71.882,145.542 72.39,145.034 72.39,143.811 72.936,143.265 72.936,142.807 C3.1@72.995,142.748
  Bottom Layer w0.254: v1(64.643,96.139) 64.643,91.694 64.897,91.44 v1(70.993,91.44) ; v1(69.088,145.796) 69.088,143.182 68.453,142.547 68.453,139.573 v1(69.342,138.684)
VBUS_5V: J1.01
VBUS_5V_2: J2.01
VREF_MID: R4.1 TP7.TP U4.1 U4.2 | length 27.3
  Top Layer w0.254: U4.2 U4.1 97.65,128.143 99.233,126.56 99.233,125.331 100.965,123.599 100.965,121.031 v1(99.949,120.015) ; v1(105.664,119.634) 108.966,116.332 TP7.TP@114.7,116.332
  Bottom Layer w0.254: v1(99.949,120.015) 105.008,120.015 105.389,119.634 v1(105.664,119.634)
VREF_MID_2: R7.1 TP17.TP U7.1 U7.2 | length 43.7
  Top Layer w0.254: v1(93.853,87.122) 94.719,87.988 97.363,87.988 98.397,86.954 U7.1 U7.2 ; R7.1 97.79,79.502 99.09,80.802 99.598,80.802 v1(101.092,82.296) ; v1(104.14,79.883) 104.14,77.724 106.194,75.67 106.404,75.67 113.242,82.508 113.242,82.867 114.83,84.455 TP17.TP
  Bottom Layer w0.254: v1(93.853,87.122) 96.266,87.122 v1(101.092,82.296) 103.311,80.077 104.073,80.077 v1@104.267,79.883
pads on no net: U1.5 U1.16 U2.4 U6.5 U6.16 U8.4

## Polygon pours and split planes (outlines as drawn)
ISO_GND_ISOW_2 on Bottom Layer "Bottom Layer-ISO_GND_ISOW_2" (solid, pour order 2): 80.962,112.649 79.311,67.922 130.429,67.922 130.429,85.217 130.429,112.649
ISO_GND_ISOW on Bottom Layer "Bottom Layer-ISO_GND_ISOW" (solid, pour order 1): 81.534,161.544 81.534,118.364 87.503,114.681 130.429,114.681 130.429,161.544
SYS_GND on Bottom Layer "Bottom Layer-SYS_GND" (solid, pour order 0): 56.959,156.4 57.404,161.417 78.613,161.417 78.232,83.82 74.295,79.502 71.501,76.073 57.404,70.104

## Keep-outs
Keep-Out Layer:
  the board outline again, w0.1

## Silkscreen, mask and mechanical layers (free items; w line width, h text height)
Mechanical 1:
  the board outline again, w0.1

## Text inside footprints (layer, text, board x,y; h text height)
U1: Top Overlay "*" at 75.629,154.864 h0.85; Mechanical 13 "*" at 77.318,153.835 h1.27
U6: Top Overlay "*" at 75.73,107.366 h0.85; Mechanical 13 "*" at 77.419,106.337 h1.27